# Altium PCB usbserial.PcbDoc
Units mm, origin at the board's own origin, x right, y up, seen from the top; angles counter-clockwise.
Board outline 12 x 22 mm, 2 copper layers (Top Layer, Bottom Layer); 7 components, 9 nets, 27 pads, 11 vias.
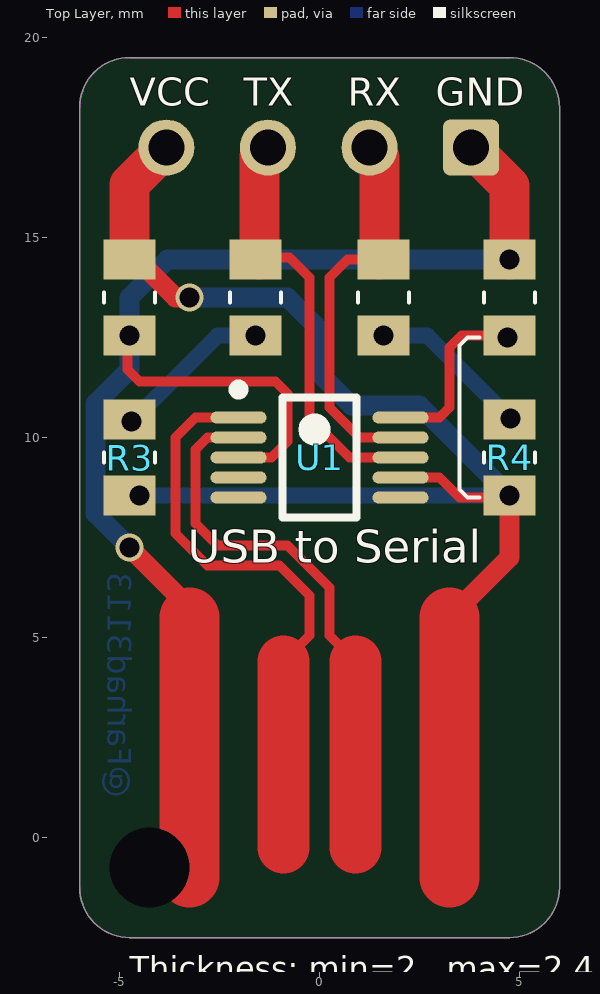
[diagram p0: Top Layer view]
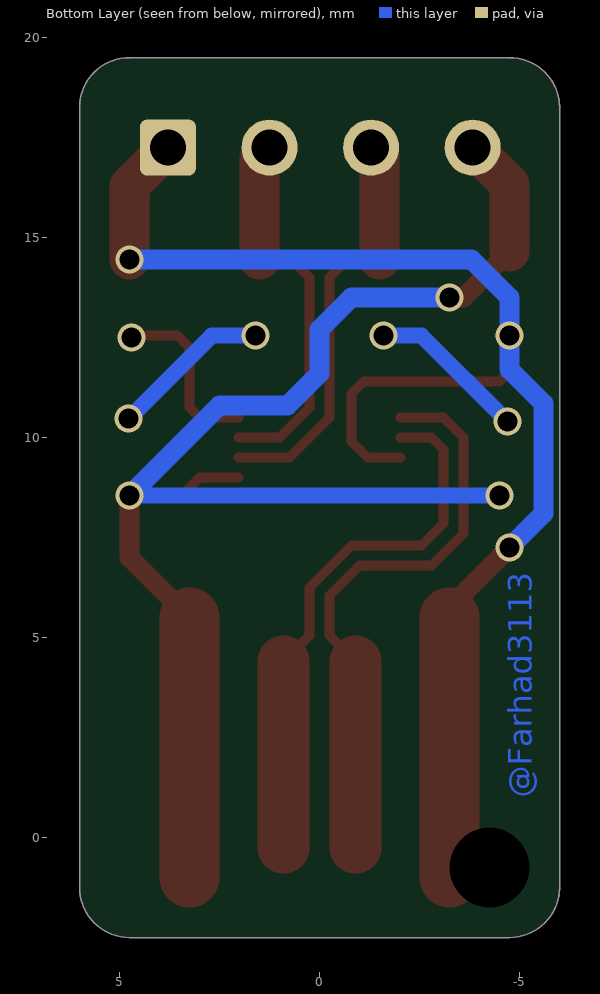
[diagram p1: Bottom Layer view, seen from below]
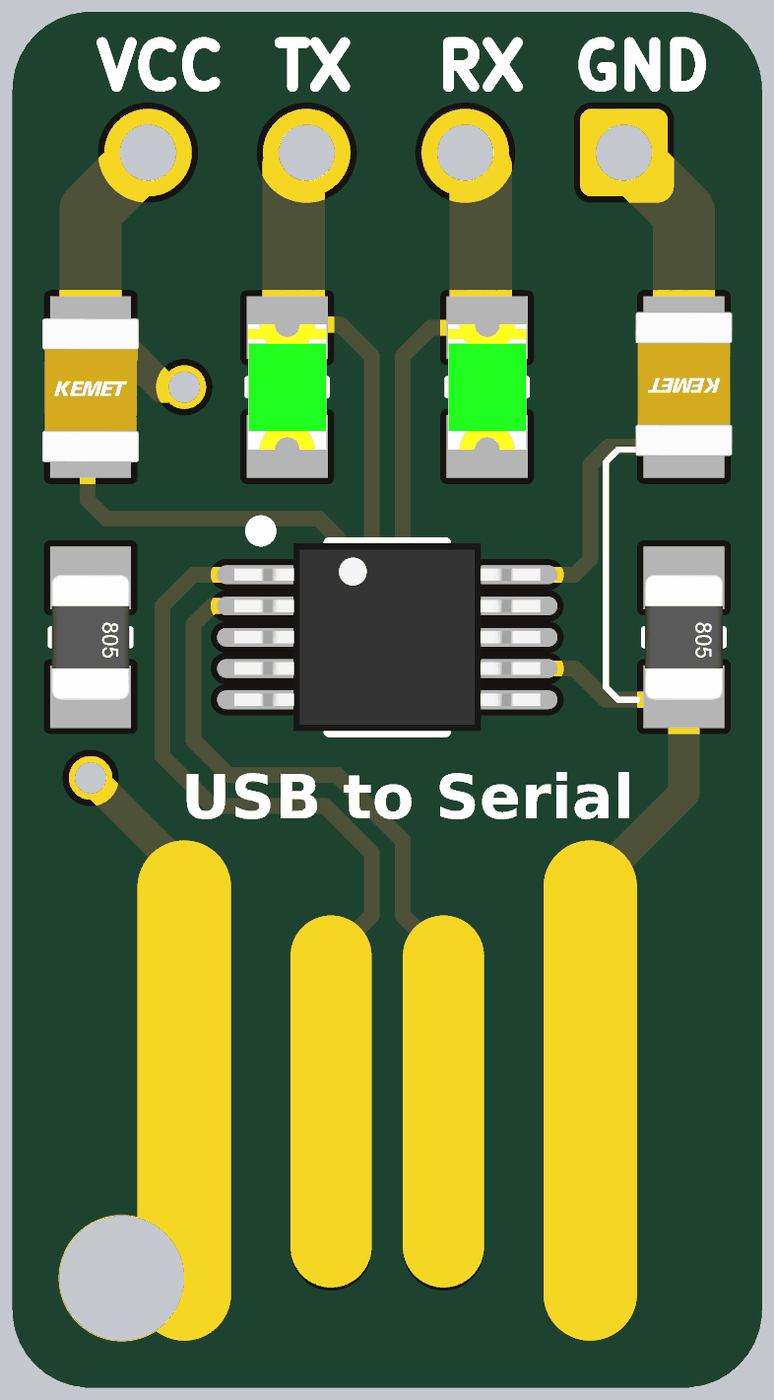
[diagram p2: 3D render of the assembled board from above, using the file's embedded part models]

## Layer stack, top to bottom
Top Solder: solder mask 0.0102, Solder Resist, Dk 3.5
Top Layer: signal copper 0.0356
Dielectric 1: dielectric 0.32, FR-4, Dk 4.8
Bottom Layer: signal copper 0.0356
Bottom Solder: solder mask 0.0102, Solder Resist, Dk 3.5

## Board outline
-6,-1.25 ccw(c-4.75,-1.25) -4.75,-2.5 4.75,-2.5 ccw(c4.75,-1.25) 6,-1.25 6,18.25 ccw(c4.75,18.25) 4.75,19.5 -4.75,19.5 ccw(c-4.75,18.25) -6,18.25

## Design rules (kind name [scope] priority, off if disabled: settings)
Clearance "MCU Clearance" [All] p1: gap=0.025 ignorepadtopadclearanceinfootprint=FALSE
PolygonConnect [All] p1: connectstyle=Relief reliefconductorwidth=0.254 reliefentries=4 polygonreliefangle="90 Angle" airgapwidth=0.254
RoutingVias [All] p1: holewidth=0.711 width=1.27 viastyle="Through Hole" minholewidth=0.711 minwidth=1.27 maxholewidth=0.711 maxwidth=1.27
SolderMaskExpansion [All] p1: expansion=0.102
Width [All] p1: maxlimit=10 minlimit=0.254 preferedwidth=0.254
30 further rules are at their usual default settings.

## Components (designator, comment, footprint, x,y, rotation, side; value= is the part's Value field where it differs from the comment)
GND "Cap Pol2" "cap 0805" 4.75,13.5 r90 top value=100nF (schematic designator C1)
R3 "Res3" "res 0805" -4.75,9.5 r270 top value=1K
R4 "Res3" "res 0805" 4.75,9.5 r270 top value=1K
RX "LED2" 0805 1.6,13.5 r90 top (schematic designator D2)
TX "LED2" 0805 -1.6,13.5 r90 top (schematic designator D1)
U1 "CH340E" CH340E 0,9.5 r0 top
VCC "Cap Pol2" "cap 0805" -4.75,13.5 r270 top value=100nF (schematic designator C2)

## Footprints (in the part's own frame and the unit in brackets; to place one, negate y for a bottom-side part, rotate by r counter-clockwise, add the part's x,y. Pads: shape width x height; smd on the part's side, far side on the other; paste and mask are expansions set on the pad)
0805 [mm] "0805"
  rect 1x1.3 smd: 1(-0.95,0) 2(0.95,0)
  silkscreen extent -0.13,-0.64 0.13,0.64, body extent -1,-0.62 1,0.63, height 1.1
"cap 0805" [mm] "0805 - with 3d model"
  rect 1x1.3 smd: 1(-0.95,0) 2(0.95,0)
  silkscreen extent -0.13,-0.64 0.13,0.64, body extent -1.1,-0.78 1.2,0.78, height 1
CH340E [mm] "MSOP-10 - with 3d model"
  oval 1.4x0.3 smd: 1(-2.025,1) 2(-2.025,0.5) 3(-2.025,0) 4(-2.025,-0.5) 5(-2.025,-1) 6(2.025,-1) 7(2.025,-0.5) 8(2.025,0) 9(2.025,0.5) 10(2.025,1)
  silkscreen extent -2.15,-1.5 0.92,1.82, body extent -2.45,-1.5 2.45,1.5, height 1.25
"res 0805" [mm] "0805 - with 3d model"
  rect 1x1.3 smd: 1(-0.95,0) 2(0.95,0)
  silkscreen extent -0.13,-0.64 0.13,0.64, body extent -1,-0.62 1,0.63, height 0.78

## Part data
GND VCC: "Polarized Capacitor (Axial)", LatestRevisionDate=17-Jul-2002, LatestRevisionNote="Re-released for DXP Platform.", PackageDescription="Polarized Capacitor; 2 Leads", PackageReference=POLAR0.8, Published=8-Jun-2000, Publisher="Altium Limited"
R3 R4: "Resistor", LatestRevisionDate=29-May-2009, LatestRevisionNote="IPC-7351 Footprint Added.", PackageDescription="Chip Resistor", PackageReference=J1-0603, Published=8-Jun-2000, Publisher="Altium Limited"
RX TX: "Typical RED, GREEN, YELLOW, AMBER GaAs LED", LatestRevisionDate=17-Jul-2002, LatestRevisionNote="Re-released for DXP Platform.", PackageDescription="SM LED; 2 Flat Leads", PackageReference=3.2X1.6X1.1, PackageVersion=Feb-2002, Published=8-Jun-2000, Publisher="Altium Limited"
U1: "TTL IC"

## Free pads (board coordinates)
  round 1.5 hole 2: ""(-4.25,-0.75)
  rrect100% 1.4x1.4 hole 0.9: ""(-3.83,17.25) ""(-1.29,17.25) ""(1.25,17.25)
  rrect25% 1.4x1.4 hole 0.9: ""(3.79,17.25)

## Via types
v1: diameter 0.7, hole 0.5, Top Layer to Bottom Layer, 11 vias

## Nets (pads, with @x,y where several pads share a name; then routed paths per layer and width w, separated by ;. In a path a pad name is that pad's centre, name@x,y a point inside that pad or via, vN(x,y) a via of type N, cw(c..) or ccw(c..) an arc to the next point about the centre after c; other vN are vias at no path point)
D+: U1.1 | length 14.7
  Top Layer w0.254: U1.1 -3.1,10.5 -3.6,10 -3.6,7.6 -2.8,6.8 -1,6.8 -0.25,6.05 -0.25,5.05 -0.9,4.4
  Top Layer w1.3: -0.9,-0.25 -0.9,4.4
D-: U1.2 | length 13.8
  Top Layer w0.254: U1.2 -2.8,10 -3.1,9.7 -3.1,7.85 -2.55,7.3 -0.8,7.3 0.25,6.25 0.25,5.05 0.9,4.4
  Top Layer w1.3: 0.9,-0.25 0.9,4.4
GND: GND.2 pad.@3.79,17.25 pad.@-4.25,-0.75 U1.3 VCC.2 | length 37
  Top Layer w0.254: v1(-4.75,12.55) -4.5,12.55 -4.8,12.25 -4.8,11.7 -4.5,11.4 -1.1,11.4 -0.8,11.1 -0.8,9.9 -1.2,9.5 U1.3
  Top Layer w0.4: -3.25,5.5 -3.25,5.75
  Top Layer w0.5: v1(-4.75,7.25) -3.25,5.75
  Top Layer w1: pad.@3.79,17.25 4.75,16.29 v1(4.75,14.45)
  Top Layer w1.5: -3.25,-1 -3.25,5.5
  Bottom Layer w0.5: v1(-4.75,7.25) -5.6,8.1 -5.6,10.85 -4.75,11.7 v1(-4.75,12.55) -4.75,13.5 -3.8,14.45 v1(4.75,14.45)
NetC1_1: GND.1 U1.10 | length 4.2
  Top Layer w0.254: U1.10 3,10.5 3.25,10.75 3.25,12.25 3.55,12.55 GND.1@4.5,12.55
  other v1: 4.7,12.5
NetD1_1: R3.1 TX.1 | length 4
  Bottom Layer w0.4: v1(-4.7,10.4) -2.55,12.55 v1(-1.6,12.55)
NetD1_2: pad.@-1.29,17.25 TX.2 U1.8 | length 10.6
  Top Layer w0.254: TX.2@-1.5,14.45 -1.45,14.5 -0.75,14.5 -0.25,14 -0.25,10.5 0.75,9.5 U1.8
  Top Layer w1: TX.2@-1.5,14.45 -1.5,17.04 pad.@-1.29,17.25
NetD2_1: R4.1 RX.1 | length 4
  Bottom Layer w0.4: v1(1.6,12.55) 2.7,12.55 v1(4.775,10.475)
NetD2_2: pad.@1.25,17.25 RX.2 U1.9 | length 9.7
  Top Layer w0.254: RX.2@1.5,14.45 0.7,14.45 0.25,14 0.25,10.75 1,10 U1.9
  Top Layer w1: pad.@1.25,17.25 1.5,17 RX.2@1.5,14.45
VCC: pad.@-3.83,17.25 R3.2 R4.2 U1.7 VCC.1 | length 37.7
  Top Layer w0.254: U1.7 3,9 3.5,8.5 R4.2@4.45,8.5
  Top Layer w0.5: VCC.1@-4.75,14.65 -3.6,13.5 v1(-3.25,13.5) ; 3.25,5.5 4.75,7 v1(4.75,8.55)
  Top Layer w1: VCC.1@-4.75,14.65 -4.75,16.33 pad.@-3.83,17.25
  Top Layer w1.5: 3.25,-1 3.25,5.5
  Bottom Layer w0.4: v1(-4.5,8.55) v1(4.75,8.55)
  Bottom Layer w0.5: v1(-3.25,13.5) -0.8,13.5 0,12.7 0,11.6 0.8,10.8 2.5,10.8 v1(4.75,8.55)
pads on no net: U1.4 U1.5 U1.6

## Keep-outs
Keep-Out Layer:
  the board outline again, w0.025

## Other copper
Bottom Layer:
  text "@Farhad3113" at -5.5,1 h1 r270

## Silkscreen, mask and mechanical layers (free items; w line width, h text height)
Top Overlay:
  lines w0.1: 4,8.5 3.7,8.5 3.5,8.7 3.5,9.1 3.5,12.3 3.7,12.5 4,12.5
  text "USB to Serial" at -3.3,6.6 h1.4
  text "Thickness: min=2 , max=2.4" at -4.75,-3.75 h1
Top Solder:
  lines w1.3: -0.9,-0.3 -0.9,4.4 ; 0.9,-0.3 0.9,4.4
  lines w1.5: -3.25,-1 -3.25,5.5 ; 3.25,-1 3.25,5.5